# Altium PCB PCB_3U_BNC.PCBDOC (part 2 of 2)
Units mil, origin at the board's own origin, x right, y up, seen from the top; angles counter-clockwise.
Board outline 2496.06 x 3937 mil, 4 copper layers (TopLayer, Internal Plane 2, Internal Plane 1, BottomLayer), stack 35.634 mil thick; 110 components, 84 nets, 514 pads, 355 vias.
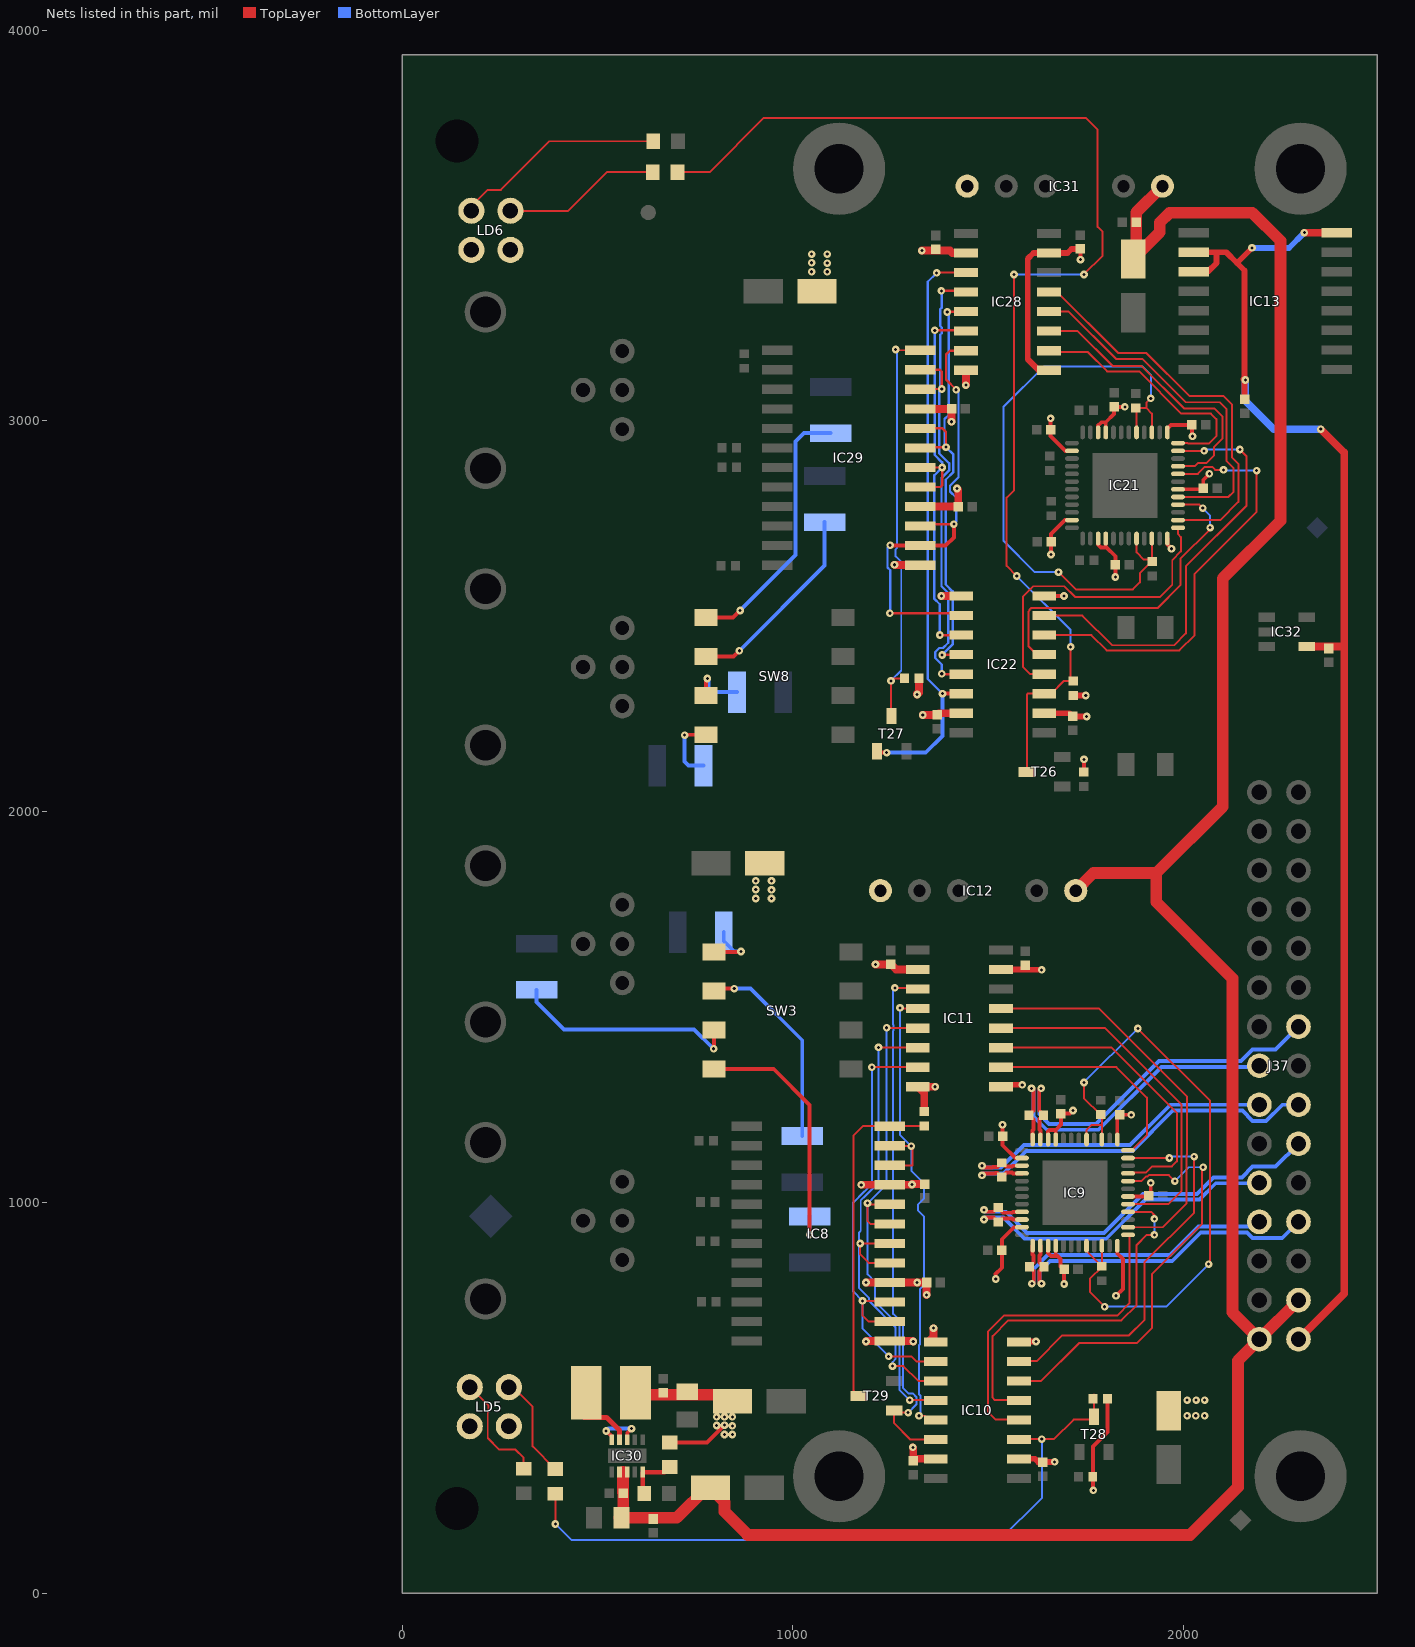
[diagram p4: the nets of this part, all layers, seen from the top]

## Via types
v1: diameter 19.68, hole 7.87, TopLayer to BottomLayer, tented both sides, 340 vias
v2: diameter 23.62, hole 11.81, TopLayer to BottomLayer, tented both sides, 15 vias

## Nets (pads, with @x,y where several pads share a name; then routed paths per layer and width w, separated by ;. In a path a pad name is that pad's centre, name@x,y a point inside that pad or via, vN(x,y) a via of type N, cw(c..) or ccw(c..) an arc to the next point about the centre after c; other vN are vias at no path point) (continued)
LVDS5_N: IC9.48 J37.15 R160.2 | length 879.5
  TopLayer w10: v1(1610.66,1292) 1613.5,1292 1615.5,1290 1615.5,1235 1604.5,1224 1616.07,1212.42 1616.07,1185.89 1613.73,1183.54 IC9.48@1613.73,1160.83
  BottomLayer w10: v1(1610.66,1292) 1615.5,1287.16 1615.5,1220.29 1649.79,1186 1782,1186 1943,1347 2191,1347 J37.15@2194,1350
LVDS5_P: IC9.47 J37.14 R160.1 | length 989.4
  TopLayer w10: IC9.47@1633.42,1160.83 1633.42,1183.54 1631.07,1185.89 1631.07,1213.57 1641.5,1224 1630.5,1235 1630.5,1290 1632.5,1292 v1(1635.34,1292)
  BottomLayer w10: v1(1635.34,1292) 1630.5,1287.16 1630.5,1226.5 1656,1201 1775.79,1201 1936.79,1362 2147.32,1362 2176.81,1391.5 2235.5,1391.5 J37.14@2294,1450
LVDS6_N: IC9.4 J37.18 R163.2 | length 1022.7
  TopLayer w10: v1(1484,1069.16) 1484,1070 1488,1074 1516.5,1074 1518,1075.5 1524,1075.5 R163.2@1535,1064.5 1547.06,1076.56 1561.11,1076.56 1563.46,1074.21 IC9.4@1586.17,1074.21
  BottomLayer w10: v1(1484,1069.16) 1488.84,1074 1539.21,1074 1597.21,1132 1869.21,1132 1972.21,1235 2150.32,1235 2176.81,1208.51 2211.19,1208.51 2252.69,1250 J37.18@2294,1250
LVDS6_P: IC9.3 J37.17 R163.1 | length 893.6
  TopLayer w10: v1(1484,1093.84) 1484,1093 1488,1089 1510.29,1089 1511.79,1090.5 1524,1090.5 R163.1@1535,1101.5 1544.95,1091.56 1561.11,1091.56 1563.46,1093.9 IC9.3@1586.17,1093.9
  BottomLayer w10: v1(1484,1093.84) 1488.84,1089 1533,1089 1591,1147 1863,1147 1966,1250 J37.17@2194,1250
LVDS7_N: IC9.10 J37.21 R166.2 | length 898.3
  TopLayer w10: v1(1489,956.16) 1493.84,961 1514,961 1525.5,949.5 R166.2@1526,949.5 1534.95,958.44 1561.11,958.44 1563.46,956.1 IC9.10@1586.17,956.1
  BottomLayer w10: v1(1489,956.16) 1489,958 1492,961 1539,961 1593,907 1802,907 1902,1007 2040.21,1007 2082.21,1049 2193,1049 J37.21@2194,1050
LVDS7_P: IC9.9 J37.20 R166.1 | length 1034.8
  TopLayer w10: v1(1489,980.84) 1493.84,976 1514,976 1524.5,986.5 1537.56,973.44 1561.11,973.44 1563.46,975.79 IC9.9@1586.17,975.79
  BottomLayer w10: v1(1489,980.84) 1489,979 1492,976 1545.21,976 1599.21,922 1795.79,922 1895.79,1022 2034,1022 2076,1064 2149.32,1064 2176.81,1091.5 2235.5,1091.5 J37.20@2294,1150
LVDS8_N: IC9.14 J37.24 R170.2 | length 871.5
  TopLayer w10: IC9.14@1633.42,889.17 1633.42,866.46 1631.07,864.11 1631.07,846.43 R170.2@1642.5,835 1631.5,824 1631.5,794 1633.5,792 v1(1636.34,792)
  BottomLayer w10: v1(1636.34,792) 1631.5,796.84 1631.5,823.5 1658,850 1971,850 2044,923 2162.32,923 2176.81,908.51 2252.51,908.51 J37.24@2294,950
LVDS8_P: IC9.13 J37.23 R170.1 | length 777.8
  TopLayer w10: v1(1611.66,792) 1614.5,792 1616.5,794 1616.5,824 R170.1@1605.5,835 1616.07,845.58 1616.07,864.11 1613.73,866.46 IC9.13@1613.73,889.17
  BottomLayer w10: v1(1611.66,792) 1616.5,796.84 1616.5,829.71 1651.79,865 1964.79,865 2037.79,938 2182,938 J37.23@2194,950
NetIC8_14: IC8.14 IC8.15 IC10.2 IC11.15 | length 1226.5
  TopLayer w5: v1(1202,1346) IC11.15@1319.7,1346 ; v1(1245,606) 1303,606 1316,593 IC10.2@1365.7,593 ; IC8.14@1248.07,695 1194,695 1178,711 v1(1178,748) 1245.07,748 IC8.15@1248.07,745
  BottomLayer w5: v1(1202,1346) 1202,1047.47 1182.18,1027.66 1181.99,1027.66 1154,999.67 1154,772 v1(1178,748) 1178,677.53 1204.34,651.18 1204.34,646.66 v1(1245,606)
NetIC8_17: IC8.17 IC8.18 IC10.3 IC11.14 | length 1295.1
  TopLayer w5: v1(1219,1397) 1220,1396 IC11.14@1319.7,1396 ; IC8.17@1248.07,845 1194,845 1172,867 v1(1172,895) IC8.18@1248.07,895 ; v1(1255,581) 1283,581 1321,543 IC10.3@1365.7,543
  BottomLayer w5: v1(1219,1397) 1219.34,1396.66 1219.34,1050.67 1186.33,1017.66 1186.13,1017.66 1173.66,1005.18 1173.66,927 1169.66,923 1169.66,780.87 1195.34,755.18 1195.34,747.66 1262.34,680.66 1262.34,598.82 1255,591.47 v1(1255,581)
NetIC8_19: IC8.19 IC8.20 IC10.4 IC11.13 | length 1329.5
  TopLayer w5: v1(1240,1447) 1241,1446 IC11.13@1319.7,1446 ; IC8.19@1248.07,945 1198,945 1191,952 v1(1191,998) 1194,995 IC8.20@1248.07,995 ; v1(1299,494) 1364.7,494 IC10.4@1365.7,493
  BottomLayer w5: v1(1240,1447) 1240,1047 v1(1191,998) 1191,815.53 1210,796.53 1210,747.14 1272.34,684.8 1272.34,520.66 v1(1299,494)
NetIC8_22: IC8.22 IC8.23 IC10.5 IC11.12 | length 1346.5
  TopLayer w5: IC8.22@1248.07,1095 1306,1095 1306,1141 v1(1303,1144) IC8.23@1249.07,1144 ; v1(1274,1498) 1276,1496 IC11.12@1319.7,1496 ; v1(1323,454) 1337,454 1348,443 IC10.5@1365.7,443
  BottomLayer w5: v1(1274,1498) 1274,1173 v1(1303,1144) 1303,1081 1335.34,1048.66 1335.34,1009.87 1319.66,994.18 1319.66,979.82 1335.34,964.13 1335.34,787.82 1324.94,777.42 1324.94,651.58 1325.34,651.18 1325.34,636.82 1323,634.47 1323,508.67 1326.34,505.33 1326.34,457.34 v1(1323,454)
NetIC8_24: IC8.24 R172.1 T29.3 | length 863.1
  TopLayer w5: T29.3@1168.72,505 1154.66,519.07 1154.66,1170.66 1179,1195 IC8.24@1248.07,1195 1335.5,1195 R172.1@1336,1195.5
NetIC9_20: IC9.20 IC9.22 IC9.39 IC9.41 R157.1 R171.1 | length 1673.6
  TopLayer w5: v1(1745,1307) 1745,1267 1787.5,1224.5 R171.1@1788,1224.5 1790.9,1221.6 1790.9,1198 ; IC9.20@1751.53,889.17 1751.53,875.47 1790.9,836.1 IC9.22@1790.9,889.17 ; IC9.41@1751.53,1160.83 1751.53,1185.53 1764,1198 1790.9,1198 ; R157.1@1790,834.5 1761,805.5 1761,770 v1(1798,733) ; IC9.39@1790.9,1160.83 1790.9,1198 ; v1(1883,1445) 2068,1260 2068,846 v1(2064,842)
  BottomLayer w5: v1(1745,1307) v1(1883,1445) ; v1(1798,733) 1955,733 v1(2064,842)
NetIC9_25: IC9.25 IC10.12 | length 843.7
  TopLayer w5: IC10.12@1560.3,444 1519,444 1499,464 1499,669 1541,711 1831,711 1861.34,741.34 1861.34,913.22 IC9.25@1857.83,916.73
NetIC9_26: IC9.26 IC11.5 | length 1019.3
  TopLayer w5: IC11.5@1532.3,1496 1784,1496 2009,1271 2009,1122.69 2007.07,1120.77 2007.07,996.55 1946.94,936.42 IC9.26@1857.83,936.42
NetIC9_28: IC9.28 IC10.13 | length 942.6
  TopLayer w5: IC10.13@1560.3,494 1517,494 1511,500 1511,658 1551,698 1841,698 1880,737 1880,891 1906,917 v1(1925,917) ; IC9.28@1857.83,975.79 1917,975.79 1925,967.79 v1(1925,958)
  BottomLayer w5: v1(1925,917) v1(1925,958)
NetIC9_29: IC9.29 IC11.4 | length 915.3
  TopLayer w5: IC11.4@1532.3,1446 1799,1446 1994.87,1250.13 1994.87,1029.87 1960.47,995.47 IC9.29@1857.83,995.47
NetIC9_32: IC9.32 IC10.14 | length 1099.8
  TopLayer w5: IC10.14@1560.3,544 IC10.14@1578.3,544 ; IC10.14@1578.3,543 1635.52,543 1732.28,639.76 1879.92,639.76 1919.29,679.13 1919.29,816.93 2046.66,944.3 2046.66,1086.66 v1(2050,1090) ; IC9.32@1857.83,1054.53 1892,1054.53 1903.82,1066.34 1907.82,1066.34 1911.1,1069.63 1962.43,1069.63 v1(1977.53,1054.53)
  BottomLayer w5: v1(1977.53,1054.53) 2013,1090 v1(2050,1090)
NetIC9_33: IC9.33 IC11.3 | length 781.8
  TopLayer w5: IC11.3@1532.3,1396 1816,1396 1983,1229 1983,1105 1970,1092 1919.33,1092 1903.67,1076.34 1859.96,1076.34 IC9.33@1857.83,1074.21
NetIC9_35: IC9.35 IC10.15 | length 1024.3
  TopLayer w5: IC10.15@1560.3,594 1624.02,594 1689.46,659.45 1860.24,659.45 1899.61,698.82 1899.61,846.46 2027,973.85 v1(2027,1117) ; IC9.35@1857.83,1113.58 v1(1963.58,1113.58)
  BottomLayer w5: v1(1963.58,1113.58) 1967,1117 v1(2027,1117)
NetIC9_36: IC9.36 IC11.2 | length 558.6
  TopLayer w5: IC11.2@1532.3,1346 1828,1346 1906,1268 1906,1172 IC9.36@1866,1132
NetIC10_6: IC10.6 IC11.11 T29.1 | length 1383.6
  TopLayer w5: v1(1261,1549) 1316.7,1549 IC11.11@1319.7,1546 ; v1(1295,462) 1264.87,462 T29.1@1259.28,467.6 1259.28,434.72 1301,393 IC10.6@1365.7,393
  BottomLayer w5: v1(1261,1549) 1256.66,1544.66 1256.66,1454.87 1257.34,1454.18 1257.34,1439.82 1256.66,1439.13 1256.66,714.63 1282.34,688.94 1282.34,524.8 1295.8,511.34 1306.18,511.34 1316.34,501.18 1316.34,483.34 v1(1295,462)
NetIC10_11: IC10.11 R154.2 R155.1 T28.3 | length 1835.5
  TopLayer w5: v1(392,177) R154.2@392,254.5 ; IC10.11@1560.3,394 v1(1637,394) 1668,394 1718.28,444.28 1774,444.28 1770.5,447.77 R155.1@1770.5,509
  BottomLayer w5: v1(392,177) 433,136 1530,136 1637,243 v1(1637,394)
NetIC21_20: IC21.20 IC21.22 IC21.39 IC21.41 R138.1 R152.1 | length 1638.9
  TopLayer w5: v1(1680,2613) 1724,2569 1870,2569 1888,2587 1888,2610 1918.5,2640.5 R152.1@1918.9,2640.5 ; IC21.20@1879.53,2699.17 1879.53,2663.47 1898,2645 1914.4,2645 R152.1@1918.9,2640.5 ; IC21.41@1879.53,2970.83 1879.53,3031.97 R138.1@1878,3033.5 1904.5,3033.5 ; v1(1916,3058) 1904.5,3046.5 1904.5,3033.5 ; IC21.22@1918.9,2699.17 R152.1@1918.9,2640.5 ; IC21.39@1918.9,2970.83 1918.9,3019.1 1904.5,3033.5 ; R152.1@1920,2640.5 R152.1@1918.9,2640.5
  BottomLayer w5: v1(1680,2613) 1619,2613 1539,2693 1539,3036 1643,3140 1728.47,3140 1728.82,3139.66 1743.18,3139.66 1743.53,3140 1894,3140 1916,3118 v1(1916,3058)
NetIC21_25: IC21.25 IC22.12 | length 818.1
  TopLayer w5: IC22.12@1643.3,2352 1607,2352 1589,2370 1589,2551 1615,2577 1695,2577 1722,2550 1940,2550 1971,2581 1971,2644 1993,2666 1993,2703 1985.83,2710.17 IC21.25@1985.83,2726.73 IC21.25@1986.34,2726.22
NetIC21_26: IC21.26 IC28.5 | length 1016.5
  TopLayer w5: IC28.5@1655.3,3330 1677,3330 1833,3174 1905,3174 2015,3064 2101,3064 2124,3041 2124,2906 2140,2890 2140,2793 2093.42,2746.42 IC21.26@1985.83,2746.42
NetIC21_28: IC21.28 IC22.13 | length 859.5
  TopLayer w5: IC22.13@1643.3,2402 1624.6,2402 1603,2423.6 1603,2512 1605.29,2514.29 1605.29,2516.92 1609.68,2521.31 1933.31,2521.31 1992,2580 1992,2647 2068,2723 v1(2068,2727) ; IC21.28@1985.83,2785.79 2040.21,2785.79 v1(2049,2777)
  BottomLayer w5: v1(2049,2777) 2068,2758 v1(2068,2727)
NetIC21_29: IC21.29 IC28.4 | length 924.5
  TopLayer w5: IC28.4@1655.3,3280 1706,3280 1827,3159 1894,3159 2005,3048 2092,3048 2110,3030 2110,2897 2128,2879 2128,2819 2114.47,2805.47 IC21.29@1985.83,2805.47
NetIC21_32: IC21.32 IC22.14 | length 1116.3
  TopLayer w5: IC22.14@1643.3,2452 1764,2452 1803,2413 1989,2413 2028,2452 2028,2609 2187,2768 v1(2187,2873) ; IC21.32@1985.83,2864.53 2036.53,2864.53 2054.34,2882.34 2073.18,2882.34 2080.53,2875 v1(2102,2875)
  BottomLayer w5: v1(2102,2875) 2104,2873 v1(2187,2873)
NetIC21_33: IC21.33 IC28.3 | length 747.2
  TopLayer w5: IC28.3@1655.3,3230 1729,3230 1818,3141 1892,3141 2001,3032 2079,3032 2100,3011 2100,2956 2078,2934 2078,2912 2059,2893 2037,2893 2028.21,2884.21 IC21.33@1985.83,2884.21
NetIC21_35: IC21.35 IC22.15 | length 1108.2
  TopLayer w5: IC22.15@1643.3,2502 1741,2502 1817,2426 1975.59,2426 2006,2456.41 2006,2628 2161,2783 2161,2910 v1(2144,2927) ; IC21.35@1985.83,2923.58 v1(2052.58,2923.58)
  BottomLayer w5: v1(2052.58,2923.58) 2056,2927 v1(2144,2927)
NetIC21_36: IC21.36 IC28.2 | length 651.2
  TopLayer w5: IC28.2@1655.3,3180 1658.3,3177 1754,3177 1804,3127 1886,3127 1994,3019 2070,3019 2084,3005 2084,2961 2065.66,2942.66 2010.61,2942.66 2010,2943.27 IC21.36@1985.83,2943.27
NetIC22_2: IC22.2 IC28.15 IC29.14 IC29.15 | length 1179.4
  TopLayer w6: v1(1248,2508) 1424.7,2508 IC22.2@1430.7,2502 ; IC29.15@1326.07,2731 1331.07,2736 v1(1412,2736) ; v1(1418,3080) 1392,3106 1392,3170 1402,3180 IC28.15@1442.7,3180
  TopLayer w10: v1(1249,2682) 1250,2681 IC29.14@1326.07,2681 1391,2681 1412,2702 v1(1412,2736)
  BottomLayer w6: v1(1248,2508) 1249,2509 1249,2617.77 1242.16,2624.61 1242.16,2675.16 v1(1249,2682) ; v1(1412,2736) 1418,2742 1418,2803.77 1402.16,2819.61 1402.16,2834.39 1423.84,2856.08 1423.84,3074.16 v1(1418,3080)
NetIC22_3: IC22.3 IC28.14 IC29.17 IC29.18 | length 1096.6
  TopLayer w6: IC29.17@1326.07,2831 1378,2831 1382,2835 v1(1382,2881) IC29.18@1326.07,2881 ; v1(1363,3232) 1440.7,3232 IC28.14@1442.7,3230 ; v1(1376,2452) IC22.3@1430.7,2452
  BottomLayer w6: v1(1363,3232) 1363,2913 1382,2894 v1(1382,2881) 1362.16,2861.16 1362.16,2544.61 1376,2530.77 v1(1376,2452)
NetIC22_4: IC22.4 IC28.13 IC29.19 IC29.20 | length 1192.7
  TopLayer w6: IC29.19@1326.07,2931 1328.07,2933 v1(1392,2933) 1392,2972 1383,2981 IC29.20@1326.07,2981 ; v1(1382,2401) 1383,2402 IC22.4@1430.7,2402 ; v1(1395,3279) 1396,3280 IC28.13@1442.7,3280
  BottomLayer w6: v1(1382,2401) 1408.84,2427.84 1408.84,2563.95 1391.16,2581.63 1391.16,2849.37 1410.84,2869.05 1410.84,2914.16 v1(1392,2933) 1388.16,2936.84 1388.16,3005.39 1398.84,3016.08 1398.84,3275.16 v1(1395,3279)
NetIC22_5: IC22.5 IC28.12 IC29.22 IC29.23 | length 1312.6
  TopLayer w6: IC29.22@1326.07,3081 1327.07,3082 v1(1381,3082) 1381,3126 1376,3131 IC29.23@1326.07,3131 ; v1(1380,3333) 1439.7,3333 IC28.12@1442.7,3330 ; v1(1381,2353) 1382,2352 IC22.5@1430.7,2352
  BottomLayer w6: v1(1380,3333) 1381,3332 1381,3290.23 1377.16,3286.39 1377.16,3243.08 1380.84,3239.39 1380.84,3224.61 1377.16,3220.92 1377.16,3085.84 v1(1381,3082) 1374.16,3075.16 1374.16,2917.4 1399.84,2891.71 1399.84,2873.61 1380.16,2853.92 1380.16,2577.08 1397.84,2559.39 1397.84,2432.4 1384.29,2418.84 1374.61,2418.84 1364.16,2408.39 1364.16,2393.61 1381,2376.77 v1(1381,2353)
NetIC22_6: IC22.6 IC28.11 T27.1 | length 1519.7
  TopLayer w6: v1(1368,3379) 1369,3380 IC28.11@1442.7,3380
  TopLayer w10: T27.1@1215.6,2154.72 1219.32,2151 v1(1240,2151) ; v1(1383,2302) IC22.6@1430.7,2302
  BottomLayer w6: v1(1368,3379) 1345.16,3356.16 1345.16,2339.84 v1(1383,2302)
  BottomLayer w10: v1(1240,2151) 1340,2151 1383,2194 v1(1383,2302)
NetIC22_11: IC22.11 R135.2 R136.1 T26.3 | length 3169.4
  TopLayer w5: R135.2@704.5,3637 787,3637 926,3776 1749,3776 1780,3745 1780,3497 1793,3484 1793,3423 v1(1745,3375) ; v1(1566,3375) 1566,2823 1547,2804 1547,2629 v1(1573,2603) ; T26.3@1598.72,2102 1598.72,2299.72 1601,2302 IC22.11@1643.3,2302 1661,2302 1693.5,2334.5 R136.1@1717,2334.5 1711,2340.5 v1(1711,2422)
  BottomLayer w5: v1(1566,3375) v1(1745,3375) ; v1(1573,2603) 1711,2465 v1(1711,2422)
NetIC29_24: IC29.24 R150.1 T27.3 | length 1059.1
  TopLayer w5: T27.3@1253,2245.28 1251,2247.28 v1(1251,2335) 1257,2341 R150.1@1285.5,2341 ; v1(1263,3183) 1265,3181 IC29.24@1326.07,3181
  BottomLayer w5: v1(1251,2335) 1277.34,2361.34 1277.34,2639.18 1263,2653.53 1263,2671.47 1266.34,2674.82 1266.34,3179.66 v1(1263,3183)
NetIC30_5: IC30.5 R167.1 R173.2 | length 131.3
  TopLayer w12: R173.2@619.5,255 615.37,259.13 IC30.5@615.37,309.66 672.16,309.66 R167.1@685,322.5
NetIC30_9: IC30.9 L1.1 | length 129.5
  TopLayer w13: L1.1@465,450 523.01,450 556.31,416.69 IC30.9@556.31,392.34
NetLD5_1: LD5.1 R153.1 | length 291.3
  TopLayer w5: LD5.1@173,527 221,479 221,464 219,462 219,397 249,367 290,367 311,346 R153.1@311,318.5
NetLD5_3: LD5.3 R154.1 | length 265.2
  TopLayer w5: LD5.3@273,527 284,527 334,477 334,375.5 R154.1@392,317.5
NetLD6_1: LD6.1 R134.1 | length 545.7
  TopLayer w5: LD6.1@177,3538 177,3549 219.5,3591.5 252.5,3591.5 377,3716 R134.1@642.5,3716
NetLD6_3: LD6.3 R135.1 | length 405.5
  TopLayer w5: LD6.3@277,3538 425,3538 524,3637 R135.1@641.5,3637
NetR139_1: R139.1 SW8.8 | length 175.4
  TopLayer w10: v1(723,2196) 724,2197 SW8.8@777.8,2197
  BottomLayer w10: v1(723,2196) 723,2128 733,2118 R139.1@771.06,2118
NetR142_1: R142.1 SW8.7 | length 149.8
  TopLayer w10: SW8.7@777.8,2297 777.8,2337.8 v1(781,2341)
  BottomLayer w10: v1(781,2341) 784,2338 784,2314 792,2306 R142.1@856.94,2306
NetR145_1: R145.1 SW8.6 | length 510.7
  TopLayer w10: SW8.6@777.8,2397 848,2397 v1(863,2412)
  BottomLayer w10: v1(863,2412) 1081,2630 R145.1@1081,2740.94
NetR148_1: R148.1 SW8.5 | length 685.1
  TopLayer w10: SW8.5@777.8,2497 847,2497 v1(865,2515)
  BottomLayer w10: v1(865,2515) 1007,2657 1007,2948 1027.94,2968.94 R148.1@1097,2968.94
NetR158_1: R158.1 SW3.8 | length 662.4
  TopLayer w10: SW3.8@797.8,1341 951,1341 1043,1249 v1(1043,917)
  BottomLayer w10: v1(1043,917) R158.1@1043,964.06
NetR161_1: R161.1 SW3.7 | length 582.2
  TopLayer w10: v1(797.2,1393.2) 797.8,1393.2 SW3.7@797.8,1441
  BottomLayer w10: R161.1@344,1543.94 344,1513 414,1443 747.39,1443 v1(797.2,1393.2)
NetR164_1: R164.1 SW3.6 | length 528.3
  TopLayer w10: SW3.6@797.8,1541 803.8,1547 v1(850,1547)
  BottomLayer w10: v1(850,1547) 892,1547 1024,1415 R164.1@1024,1170.06
NetR168_1: R168.1 SW3.5 | length 147.8
  TopLayer w10: SW3.5@797.8,1641 866,1641 v1(867,1642)
  BottomLayer w10: R168.1@823.06,1692 823.06,1668.94 850,1642 v1(867,1642)
P3V3: C14.2 C15.2 C16.2 C17.2 C18.1 C19.2 C20.2 C21.2 C22.2 C23.2 C24.2 C53.2 C54.2 C55.2 C56.2 C69.2 C70.2 C71.1 C72.2 C73.2 IC9.2 IC9.11 IC9.15 IC9.16 IC9.24 IC9.30 IC9.37 IC9.45 IC9.46 IC10.10 IC10.16 IC11.1 IC11.7 IC21.2 IC21.11 IC21.15 IC21.16 IC21.24 IC21.30 IC21.37 IC21.45 IC21.46 IC22.10 IC22.16 IC28.1 IC28.7 IC30.8 IC30.10 L1.2 LD5.2 LD5.4 LD6.2 LD6.4 R136.2 R137.2 R155.2 R156.2 R167.2 | length 3490
  TopLayer w10: v1(522,415) 536.63,400.37 IC30.10@536.63,392.34 ; IC30.8@576,392.34 576,410 v1(587,421) ; R167.2@685,385.5 780.5,385.5 v1(825,430) ; v1(1519.16,804) 1519.16,816.84 1519,817 1534.72,832.72 C69.2@1534.72,878 1534.72,905.72 1565.42,936.42 IC9.11@1586.17,936.42 ; v1(1536.72,1198.72) C70.2@1536.72,1169 1536.72,1146.28 1569.42,1113.58 IC9.2@1586.17,1113.58 ; IC22.16@1643.3,2552 v1(1694,2552) ; IC9.15@1653.1,889.17 1653.1,870.9 1661,863 1677,863 ; IC9.46@1653.1,1160.83 1653.1,1182.1 1656.79,1185.79 1672.79,1185.79 ; v1(1659.72,3006.72) C14.2@1659.72,2978 1659.72,2961.28 1697.42,2923.58 IC21.2@1714.17,2923.58 ; v1(1660.72,2658.28) C15.2@1660.72,2691 1660.72,2710.72 1696.42,2746.42 IC21.11@1714.17,2746.42 ; IC9.16@1672.79,889.17 1672.79,867.21 1677,863 ; IC9.45@1672.79,1160.83 1672.79,1185.79 ; C24.2@1685,836 1685,855 1677,863 ; v1(1694.28,791.28) C24.2@1694.28,829 ; v1(1717,1235) 1709.28,1227.28 C72.2@1686,1227.28 1686,1199 1672.79,1185.79 ; v1(1736,3413) C53.2@1736,3440.28 ; R137.2@1745,2101.5 v1(1745,2134) ; v1(1769,263) 1768.5,263.5 1768.5,375.5 1805.5,412.5 R155.2@1805.5,498 ; IC21.15@1781.1,2699.17 1781.1,2683.9 1789,2676 1803,2676 ; IC21.46@1781.1,2970.83 1781.1,2988.1 1789.79,2996.79 1800.79,2996.79 ; IC21.16@1800.79,2699.17 1800.79,2678.21 1803,2676 ; IC21.45@1800.79,2970.83 1800.79,2996.79 ; v1(1825.28,2600.72) C54.2@1825.28,2632 1825.28,2653.72 1803,2676 ; v1(1827,761) 1844.84,778.84 1844.84,855.16 1830.27,869.73 IC9.24@1830.27,889.17 ; IC9.37@1830.27,1160.83 1830.27,1218.55 C20.2@1836,1224.28 v1@1860.28,1224.28 ; v1(1849.72,3036.28) C55.2@1822,3036.28 1822,3018 1800.79,2996.79 ; IC9.30@1857.83,1015.16 1909.44,1015.16 C23.2@1911.28,1017 1911,1017.28 1916,1022.28 v1(1916,1050) ; IC21.24@1958.27,2699.17 1958.27,2683.73 v1(1969,2673) ; IC21.37@1958.27,2981 1967.27,2990 C19.2@2021.28,2990 2021.28,2962.72 v1(2023,2961) ; IC21.30@1985.83,2825.16 2047.44,2825.16 C56.2@2050.28,2828 2050.28,2849.28 v1(2066,2865)
  TopLayer w15: IC11.1@1532.3,1301 v1(1587,1301) ; IC11.7@1532.3,1596 1602.28,1596 1603,1595.28 v1(1636.72,1595.28) ; IC10.10@1560.3,344 1619.72,344 1629,334.72 C22.2@1639,334.72 1640.28,336 v1(1670,336) ; IC10.16@1560.3,644 v1(1622,644) ; IC22.10@1643.3,2252 1707.72,2252 C16.2@1716,2243.72 v1(1751.72,2243.72) ; IC28.1@1655.3,3130 1629,3130 1601,3158 1601,3415 1616,3430 IC28.7@1655.3,3430 1703,3430 1713.28,3440.28 C53.2@1736,3440.28 ; R136.2@1717,2297.5 v1(1749.5,2297.5)
  TopLayer w30: L1.2@597,513 602,508 730,508 C71.1@825.1,508
  BottomLayer w10: v1(522,415) 528,421 v1(587,421)
  other v1: 825,406 845,406 845,428 805,429 805,451 825,451 845,451 2009,454 2031,454 2054,454 2009,494 2032,494 2054,494 1866,1224
P3V3_MP: C37.2 C38.2 IC13.2 IC13.3 IC13.16 IC32.4 J37.30 | length 3640.8
  TopLayer w15: IC13.3@2025.93,3382 2062,3382 2084,3404 2084,3432 ; IC13.2@2025.93,3432 2084,3432 ; C38.2@2156,3055.72 2156,3107 2156,3385 2136.5,3404.5 ; v1(2175,3443) 2136.5,3404.5 ; 2084,3432 2109,3432 2136.5,3404.5
  TopLayer w20: v1@2156,3107 v1(2158,3105) ; J37.30@2294,650 2411,767 2411,2418 ; v1(2309,3482) IC13.16@2392.07,3482 ; IC32.4@2315.18,2422.6 2406.4,2422.6 2411,2418 ; v1(2351,2979) 2411,2919 2411,2418
  BottomLayer w15: v1(2175,3443) 2270,3443 v1(2309,3482)
  BottomLayer w20: v1(2158,3105) 2158,3052 2231,2979 v1(2351,2979)
P5V0_ISO1: C48.2 C49.2 C50.2 C51.2 C52.1 IC22.1 IC22.7 IC28.10 IC28.16 IC29.13 IC29.16 IC29.21 IC31.6 R150.2 | length 671
  TopLayer w20: v1(1260,2632) 1261,2631 IC29.13@1326.07,2631 ; v1@1317,2301 v1(1318,2300) 1322.5,2304.5 R150.2@1322.5,2341 ; IC29.16@1326.07,2781 C50.2@1423.28,2781 1423.28,2823.72 v1(1420,2827) ; IC29.21@1328.07,3031 C49.2@1406.28,3031 1406,3030.72 v1(1406,2998) ; v1(1330,3436) 1402,3436 1408,3430 IC28.10@1442.7,3430 ; v1(1332.28,2247.72) C48.2@1370,2247.72 1374.28,2252 IC22.7@1430.7,2252 ; v1(1380,2552) IC22.1@1430.7,2552 ; v1(1442.7,3091.7) IC28.16@1442.7,3130
  other v1: 1048,3382 1088,3382 1088,3404 1048,3405 1048,3427 1088,3427
P5V0_ISO2: C28.2 C29.2 C30.2 C31.2 C32.1 IC8.13 IC8.16 IC8.21 IC10.1 IC10.7 IC11.10 IC11.16 IC12.6 R172.2 | length 809.5
  TopLayer w20: v1(1175,1045) IC8.21@1248.07,1045 1304,1045 v1(1305,1046) 1305.72,1046.72 C30.2@1337,1046.72 ; v1(1187,644) 1188,645 IC8.13@1248.07,645 1307,645 v1(1308,644) ; v1(1187,795) IC8.16@1248.07,795 v1(1318,795) ; v1(1211.28,1609.28) C31.2@1251,1609.28 1264.28,1596 IC11.10@1319.7,1596 ; v1(1307,373) 1308,372 C28.2@1308,344 ; C28.2@1308,338.72 C28.2@1308,344 ; v1@1322,795 C29.2@1342.28,795 v1(1342.28,763.28) ; R172.2@1336,1232.5 1336,1279.7 IC11.16@1319.7,1296 v1(1364,1296) ; IC10.7@1347.7,344 C28.2@1308,344 ; IC10.1@1347.7,644 1360,656.3 v1(1360,678)
  other v1: 905,1778 945,1778 945,1800 905,1801 905,1823 945,1823
P12V0: C33.2 C34.1 C35.2 C36.1 C74.2 C75.2 IC12.1 IC30.2 IC30.3 IC31.1 J37.28 J37.29 | length 6347.9
  TopLayer w30: C75.2@555.43,193 C75.2@559.43,189 ; C74.2@565,257.28 565,310 ; C74.2@565.72,256 565.72,197.28 C75.2@561.43,193 703,193 784,274 825.1,232.9 825.1,207.9 884,149 2017,149 2139,271 2139,595 J37.29@2194,650 ; IC12.1@1724,1798 1769.1,1843.1 1930.1,1843.1 ; C36.1@1871,3414.9 C36.1@1878.72,3422.61 ; IC31.1@1946,3601 1878.72,3533.72 C33.2@1878.72,3509 C36.1@1878.72,3422.61 ; J37.28@2294,750 J37.29@2194,650 ; C36.1@1878.72,3422.61 1939,3482.9 1939,3508 1964,3533 2176,3533 2248,3461 2248,2745 2100,2597 2100,2013 1930.1,1843.1 ; 1930.1,1843.1 1930.1,1768.9 2125,1574 2125,719 J37.29@2194,650
pads on no net: FTG17.FTG2 FTG18.1 FTG19.1 FTG20.1 IC9.17 IC9.44 IC12.5 IC13.13 IC21.17 IC21.44 IC30.4 IC30.7 IC31.5 IC32.5 J35.6 J35.7 J36.6 J36.7 J38.6 J38.7 J39.6 J39.7

## Polygon pours and split planes (outlines as drawn)
GND on TopLayer "TopLayer-No Net" (solid, remove dead copper, pour order 26): 1407,3762 1170,3525 739,3525 614,3400 70,3400 70,3615 245,3615 245,3815 1793,3815 1793,3717 1758,3717 1758,3736 1732,3762
GND on TopLayer "MidLayer1-No Net" (solid, remove dead copper, pour order 14): 1537,1987 1537,3426 1609,3498 1758,3498 1758,3818 2456.69,3818 2456.69,119 240,119 240,319 70,319 70,608 529,608 688.98,608 695.88,551.18 947.2,551.18 1237,281.96 1237,210 1255,192 1447,192 1465,210 1465,1730 1537,1785.99
GND_ISO1 on TopLayer "TopLayer-No Net" (solid, remove dead copper, pour order 18): 764,3465 1194,3465 1431,3702 1698,3702 1698,3558 1584,3558 1477,3451 1477,2029 73,2029 73,3340 639,3340
GND_ISO2 on TopLayer "MidLayer1-No Net" (solid, remove dead copper, pour order 10): 63,1924 1429.72,1924 1429.72,1729.72 1405,1705 1405,252 1297,252 1297,389 1018,668 63,668
GND on BottomLayer "TopLayer-No Net" (solid, pour order 24): 1407,3762 1170,3525 739,3525 614,3400 70,3400 70,3615 245,3615 245,3815 1793,3815 1793,3717 1758,3717 1758,3736 1732,3762
GND_ISO1 on BottomLayer "TopLayer-No Net" (solid, remove dead copper, pour order 22): 764,3465 1194,3465 1431,3702 1698,3702 1698,3558 1584,3558 1477,3451 1477,2029 73,2029 73,3340 639,3340
GND_ISO2 on BottomLayer "MidLayer1-No Net" (solid, remove dead copper, pour order 12): 63,1924 1308.64,1924 1427.17,1924 1427.17,1742.13 1405,1705 1405,252 1297,252 1297,389 1018,668 63,668
GND on BottomLayer "GND_L04_P016" (solid, remove dead copper, pour order 16): 1465,1730 1537,1802 1537,3426 1609,3498 1758,3498 1758,3818 2456.69,3818 2456.69,119 240,119 240,319 70,319 70,608 994,608 1237,365 1237,210 1255,192 1447,192 1465,210
P5V0_ISO1 on Internal Plane 2 (split plane): 1698.38,3557.62 1597,3557.62 1592.37,3557.25 1587.85,3556.17 1585.7,3555.28 1583.55,3554.39 1579.59,3551.96 1576.06,3548.94 1486.06,3458.94 1483.04,3455.41 1480.61,3451.45 1479.35,3448.41 1478.83,3447.15 1477.75,3442.63 1477.38,3438 1477.38,2028.62 72.62,2028.62 72.62,3292 72.62,3340.38 627,3340.38 631.63,3340.75 636.15,3341.83 637.41,3342.35 640.45,3343.61 644.41,3346.04 647.94,3349.06 764.27,3465.38 1182,3465.38 1186.63,3465.75 1191.15,3466.83 1192.41,3467.35 1195.45,3468.61 1199.41,3471.04 1202.94,3474.06 1431.27,3702.38 1698.38,3702.38
P5V0_ISO2 on Internal Plane 2 (split plane): 1456.6,1757.49 1414.06,1714.94 1411.04,1711.41 1408.61,1707.45 1407.35,1704.41 1406.83,1703.15 1405.75,1698.63 1405.38,1694 1405.38,1324.31 1405.38,714.08 1405.38,251.62 1296.62,251.62 1296.62,377 1296.25,381.63 1295.17,386.15 1293.39,390.45 1290.96,394.41 1287.94,397.94 1026.94,658.94 1023.41,661.96 1019.45,664.39 1016.41,665.65 1015.15,666.17 1010.63,667.25 1006,667.62 61.62,667.62 61.62,1924.38 1456.6,1924.38
P3V3 on Internal Plane 2 (split plane): 2475.97,20.1 20.1,20.1 20.1,610.97 22.85,609.83 27.37,608.75 32,608.38 993.73,608.38 1237.38,364.73 1237.38,222 1237.75,217.37 1238.83,212.85 1240.61,208.55 1243.04,204.59 1246.06,201.06 1249.59,198.04 1253.55,195.61 1257.85,193.83 1262.37,192.75 1267,192.38 1435,192.38 1439.63,192.75 1444.15,193.83 1448.45,195.61 1452.41,198.04 1455.94,201.06 1458.96,204.59 1461.39,208.55 1463.17,212.85 1464.25,217.37 1464.62,222 1464.62,714.08 1464.62,1324.31 1464.62,1681.73 1507.16,1724.28 1510.18,1727.81 1512.61,1731.77 1513.5,1733.92 1514.39,1736.07 1515.47,1740.59 1515.84,1745.22 1515.84,1954 1515.47,1958.63 1514.39,1963.15 1512.61,1967.45 1511.22,1969.71 1511.63,1969.75 1516.15,1970.83 1520.45,1972.61 1524.41,1975.04 1527.94,1978.06 1530.96,1981.59 1533.39,1985.55 1535.17,1989.85 1536.25,1994.37 1536.62,1999 1536.62,3425.73 1609.27,3498.38 1728,3498.38 1732.63,3498.75 1737.15,3499.83 1741.45,3501.61 1745.41,3504.04 1748.94,3507.06 1751.96,3510.59 1754.39,3514.55 1756.17,3518.85 1757.25,3523.37 1757.62,3528 1757.62,3724 1757.25,3728.63 1756.17,3733.15 1754.39,3737.45 1751.96,3741.41 1748.94,3744.94 1745.41,3747.96 1744.51,3748.51 1743.96,3749.41 1740.94,3752.94 1737.41,3755.96 1733.45,3758.39 1729.15,3760.17 1724.63,3761.25 1720,3761.62 1419,3761.62 1414.37,3761.25 1409.85,3760.17 1407.7,3759.28 1405.55,3758.39 1401.59,3755.96 1398.06,3752.94 1169.73,3524.62 752,3524.62 747.37,3524.25 742.85,3523.17 741.59,3522.65 738.55,3521.39 734.59,3518.96 731.06,3515.94 614.73,3399.62 43,3399.62 38.37,3399.25 33.85,3398.17 29.55,3396.39 25.59,3393.96 22.06,3390.94 20.1,3388.65 20.1,3916.9 2475.97,3916.9
GND_ISO1 on Internal Plane 1 (split plane): 1698.38,3557.62 1597,3557.62 1592.37,3557.25 1587.85,3556.17 1585.7,3555.28 1583.55,3554.39 1579.59,3551.96 1576.06,3548.94 1486.06,3458.94 1483.04,3455.41 1480.61,3451.45 1479.35,3448.41 1478.83,3447.15 1477.75,3442.63 1477.38,3438 1477.38,2028.62 72.62,2028.62 72.62,3292 72.62,3340.38 627,3340.38 631.63,3340.75 636.15,3341.83 637.41,3342.35 640.45,3343.61 644.41,3346.04 647.94,3349.06 764.27,3465.38 1182,3465.38 1186.63,3465.75 1191.15,3466.83 1192.41,3467.35 1195.45,3468.61 1199.41,3471.04 1202.94,3474.06 1431.27,3702.38 1698.38,3702.38
GND_ISO2 on Internal Plane 1 (split plane): 1456.6,1757.49 1414.06,1714.94 1411.04,1711.41 1408.61,1707.45 1407.35,1704.41 1406.83,1703.15 1405.75,1698.63 1405.38,1694 1405.38,1324.31 1405.38,714.08 1405.38,251.62 1296.62,251.62 1296.62,377 1296.25,381.63 1295.17,386.15 1293.39,390.45 1290.96,394.41 1287.94,397.94 1026.94,658.94 1023.41,661.96 1019.45,664.39 1016.41,665.65 1015.15,666.17 1010.63,667.25 1006,667.62 61.62,667.62 61.62,1924.38 1456.6,1924.38
GND on Internal Plane 1 (split plane): 2475.97,20.1 20.1,20.1 20.1,610.97 22.85,609.83 27.37,608.75 32,608.38 993.73,608.38 1237.38,364.73 1237.38,222 1237.75,217.37 1238.83,212.85 1240.61,208.55 1243.04,204.59 1246.06,201.06 1249.59,198.04 1253.55,195.61 1257.85,193.83 1262.37,192.75 1267,192.38 1435,192.38 1439.63,192.75 1444.15,193.83 1448.45,195.61 1452.41,198.04 1455.94,201.06 1458.96,204.59 1461.39,208.55 1463.17,212.85 1464.25,217.37 1464.62,222 1464.62,714.08 1464.62,1324.31 1464.62,1681.73 1507.16,1724.28 1510.18,1727.81 1512.61,1731.77 1513.5,1733.92 1514.39,1736.07 1515.47,1740.59 1515.84,1745.22 1515.84,1954 1515.47,1958.63 1514.39,1963.15 1512.61,1967.45 1511.22,1969.71 1511.63,1969.75 1516.15,1970.83 1520.45,1972.61 1524.41,1975.04 1527.94,1978.06 1530.96,1981.59 1533.39,1985.55 1535.17,1989.85 1536.25,1994.37 1536.62,1999 1536.62,3425.73 1609.27,3498.38 1728,3498.38 1732.63,3498.75 1737.15,3499.83 1741.45,3501.61 1745.41,3504.04 1748.94,3507.06 1751.96,3510.59 1754.39,3514.55 1756.17,3518.85 1757.25,3523.37 1757.62,3528 1757.62,3724 1757.25,3728.63 1756.17,3733.15 1754.39,3737.45 1751.96,3741.41 1748.94,3744.94 1745.41,3747.96 1744.51,3748.51 1743.96,3749.41 1740.94,3752.94 1737.41,3755.96 1733.45,3758.39 1729.15,3760.17 1724.63,3761.25 1720,3761.62 1419,3761.62 1414.37,3761.25 1409.85,3760.17 1407.7,3759.28 1405.55,3758.39 1401.59,3755.96 1398.06,3752.94 1169.73,3524.62 752,3524.62 747.37,3524.25 742.85,3523.17 741.59,3522.65 738.55,3521.39 734.59,3518.96 731.06,3515.94 614.73,3399.62 43,3399.62 38.37,3399.25 33.85,3398.17 29.55,3396.39 25.59,3393.96 22.06,3390.94 20.1,3388.65 20.1,3916.9 2475.97,3916.9

## Keep-outs
KeepOutLayer:
  lines w8: 65,319 65,3619 240,3619 240,3819 2456.69,3819 2456.69,119 240,119 240,319 65,319

## Other copper
TopLayer:
  rectangle net GND_ISO1: 757.87,3287.4 885.83,3375.98
  rectangle net GND_ISO2: 633.61,1820.43 761.57,1913
  region net GND: 937,479 937,396 1000,396 1000,479
  region net GND: 956,288 956,371 893,371 893,288
  region net P3V3: 793,478 793,395 856,395 856,478
  rectangle net P3V3: 1982,442 2065,505
  rectangle net GND: 1979,292 2062,355
  region net GND: 1783,2000 1700,2000 1700,1937 1783,1937
  region net GND: 1848,3325 1765,3325 1765,3262 1848,3262
  region net P5V0_ISO1: 1100,3355 1100,3438 1037,3438 1037,3355
  region net P5V0_ISO2: 893,1850 893,1767 956,1767 956,1850
  rectangle net GND: 496,332 536,370
  region net GND: 524,382 441,382 441,319 524,319
  rectangle net GND: 603,334 641,368
Internal Plane 1 (plane layer: these items are gaps in the copper):
  lines w59.06: 1720,3732 1419,3732 1182,3495 752,3495 627,3370 43,3370 43,3292 43,1999 434,1999 1507,1999 1507,3438 1597,3528 1728,3528 1728,3724 ; 32,638 1006,638 1267,377 1267,222 1435,222 1435,714.08 1435,1324.31 1435,1694 1486.22,1745.22 1486.22,1954 32,1954 32,638
Internal Plane 2 (plane layer: these items are gaps in the copper):
  lines w59.06: 1720,3732 1419,3732 1182,3495 752,3495 627,3370 43,3370 43,3292 43,1999 434,1999 1507,1999 1507,3438 1597,3528 1728,3528 1728,3724 ; 32,638 1006,638 1267,377 1267,222 1435,222 1435,714.08 1435,1324.31 1435,1694 1486.22,1745.22 1486.22,1954 32,1954 32,638

## Silkscreen, mask and mechanical layers (free items; w line width, h text height)
TopOverlay:
  drawing of 1222 lines, arcs and shapes, not listed
  text "BOT OUT" at 325,3607 h40
  text "TOP IN" at 330,3542 h40
  text "IO2/IO4" at 521,3388 h50
  text "IO1/IO3" at 515,2684 h50
  text "IO4" at 1176,2476 h40
  text "IO3" at 1181,2382 h40
  text "OUT" at 2047,2334 h40
  text "IO2" at 1170,2277 h40
  text "IN" at 2047,2262 h40
  text "Termination" at 728,2121 h40 r90
  text "IO1" at 1224,2071 h40
  text "IO6/IO8" at 499,1976 h50
  text "IO1-4" at 1883,1897 h40 r90
  text "IO5-8" at 1960,1888 h40 r90
  text "IO8" at 1187,1678 h40
  text "IO7" at 1186,1534 h40
  text "IO6" at 1235,1383 h40 r90
  text "Termination" at 753,1285 h40 r90
  text "IO5/IO7" at 379,1275 h50
  text "IO5" at 1171,1265 h40
  text "TO KASLI/METLINO VHDCI" at 2049,958 h40 r90
  text "BOT OUT" at 266,97 h40
  text "PCB 3U BNC rev1.0" at 603,38 h80
  text "TOP IN" at 271,32 h40
BottomOverlay:
  drawing of 1216 lines, arcs and shapes, not listed
  text "PCB 3U BNC rev1.0" at 1918,34 h80
Mechanical1:
  the board outline again, w20

## Dimensions
-20,217 to 0,0 on Mechanical4
140,-20 to 0,0 on Mechanical4

## Text inside footprints (layer, text, board x,y; h text height)
IC12: Mechanical14 "1" at 1694.47,1877.92 h59.06 r270; Mechanical14 "6" at 1193.17,1882.92 h59.06 r270
IC31: Mechanical14 "1" at 1916.47,3680.92 h59.06 r270; Mechanical14 "6" at 1415.17,3685.92 h59.06 r270
J37: TopOverlay "30" at 2349,675 h40 r270; Mechanical14 "30" at 2349,675 h40 r270
LD5: TopOverlay "C" at 91.82,507.98 h39.37; TopOverlay "A" at 91.82,407.98 h39.37; Mechanical14 "A" at 91.82,407.98 h39.37; Mechanical14 "C" at 91.82,507.98 h39.37
LD6: TopOverlay "C" at 95.82,3518.98 h39.37; TopOverlay "A" at 95.82,3418.98 h39.37; Mechanical14 "A" at 95.82,3418.98 h39.37; Mechanical14 "C" at 95.82,3518.98 h39.37
SW3: TopOverlay "4" at 1078,1626 h39.37 r90; TopOverlay "3" at 1078,1526 h39.37 r90; TopOverlay "ON" at 903,1306 h39.37 r90; TopOverlay "2" at 1078,1426 h39.37 r90; TopOverlay "1" at 1078,1336 h39.37 r90; Mechanical14 "4" at 1078,1626 h39.37 r90; Mechanical14 "3" at 1078,1526 h39.37 r90; Mechanical14 "ON" at 903,1306 h39.37 r90; Mechanical14 "2" at 1078,1426 h39.37 r90; Mechanical14 "1" at 1078,1336 h39.37 r90
SW8: TopOverlay "4" at 1058,2482 h39.37 r90; TopOverlay "3" at 1058,2382 h39.37 r90; TopOverlay "ON" at 883,2162 h39.37 r90; TopOverlay "2" at 1058,2282 h39.37 r90; TopOverlay "1" at 1058,2192 h39.37 r90; Mechanical14 "4" at 1058,2482 h39.37 r90; Mechanical14 "3" at 1058,2382 h39.37 r90; Mechanical14 "ON" at 883,2162 h39.37 r90; Mechanical14 "2" at 1058,2282 h39.37 r90; Mechanical14 "1" at 1058,2192 h39.37 r90
SW9: TopOverlay "1" at 1848,2191 h39.37; TopOverlay "2" at 1938,2191 h39.37; TopOverlay "ON" at 1818,2366 h39.37; Mechanical14 "1" at 1848,2191 h39.37; Mechanical14 "2" at 1938,2191 h39.37; Mechanical14 "ON" at 1818,2366 h39.37